# EAGLE board connector driver motor (EAGLE 9.6.2)
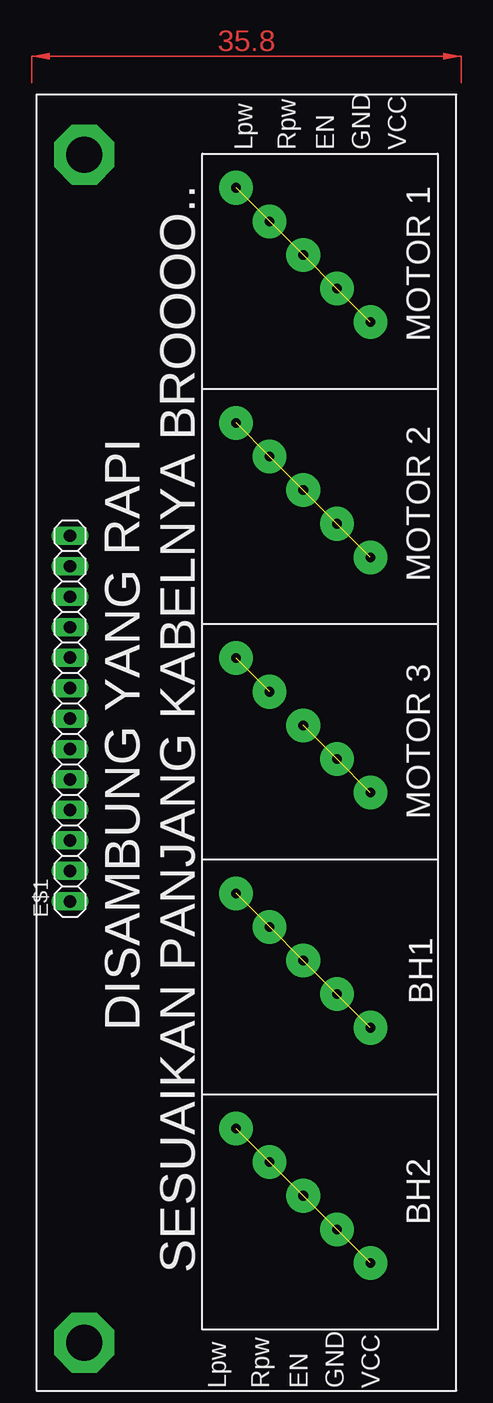
[diagram p0: board, top side]
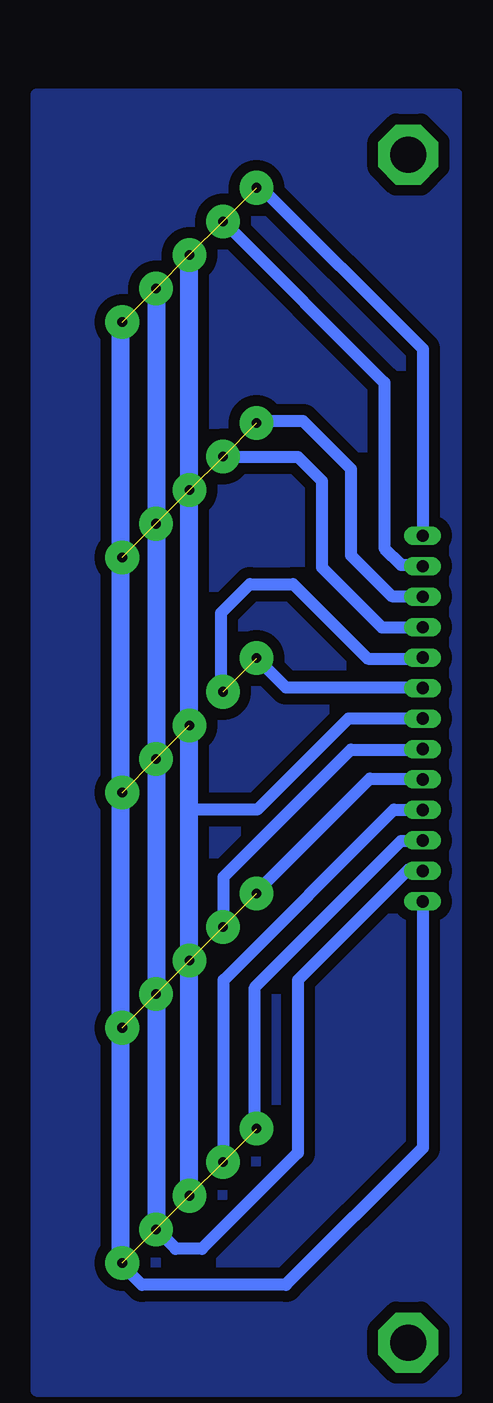
[diagram p1: board, bottom side, seen from below]

No outline drawn. Coordinates in mm, seen from the top.
Copper layers (1*16): Top 0.035mm / dielectric 1.5mm / Bottom 0.035mm
Design rules "default *": minimum track width 6mil, minimum drill 0.35mm, track to track 36mil, track to pad 36mil, pad to pad 36mil, via to via 36mil, smd to smd 6mil, copper to edge 40mil, drill to drill 6mil, minimum pad ring 10mil, minimum via ring 8mil, stop-mask expansion 4mil, vias tented up to drill 0mil, thermal gap 10mil

## Footprints (pad centres in the part's own frame; a part is rotated, then mirrored left to right if it is on the bottom)
1X13 = drill 1.016 long: 1 -15.24,0; 2 -12.7,0; 3 -10.16,0; 4 -7.62,0; 5 -5.08,0; 6 -2.54,0; 7 0,0; 8 2.54,0; 9 5.08,0; 10 7.62,0; 11 10.16,0; 12 12.7,0; 13 15.24,0

## Placement (x,y rotation side)
E$1  [1X13]  2.81,56 90 top

## Library data of the parts
E$1 = adafruit

## Tracks (layer width: path | path; a pad name or v marks a point on that pad's centre or on a via)
PLG
  pour Bottom: 0,108 35,108 35,0 0,0
S$1  (via drill 3 pad 5)
  other vias: 4,103
S$2  (via drill 3 pad 5)
  other vias: 4,4
S$3
  Bottom 1.5: 28,89 28,10.5
S$4  (via drill 0.8 pad 2.8)  (4 unrouted)
  other vias: 16.64,100.23 19.44,97.43 22.24,94.63 25.04,91.83 27.84,89.03
S$5  (via drill 0.8 pad 2.8)  (4 unrouted)
  other vias: 16.64,80.63 19.44,77.83 22.24,75.03 25.04,72.23 27.84,69.43
S$6  (via drill 0.8 pad 2.8)  (2 unrouted)
  other vias: 22.24,55.43 25.04,52.63 27.84,49.83
S$7  (via drill 0.8 pad 2.8)  (4 unrouted)
  other vias: 16.64,41.43 19.44,38.63 22.24,35.83 25.04,33.03 27.84,30.23
S$8  (via drill 0.8 pad 2.8)  (4 unrouted)
  other vias: 16.64,21.83 19.44,19.03 22.24,16.23 25.04,13.43 27.84,10.63
S$9
  Bottom 1.5: 25,92 25,13.5
S$10
  Bottom 1.5: 22.29,94.67 22.29,16.31 22.25,16.27
S$11
  Bottom 1: 16.5,100.5 2.8,86.8 2.8,71.2
S$12
  Bottom 1: 19.4,97.4 6,84 6,70.2 4.6,68.8 2.8,68.8
S$13
  Bottom 1: 16.6,80.8 12.8,80.8 8.8,76.8 8.8,69.6 5.4,66.2 2.8,66.2
S$14
  Bottom 1: 19.4,77.8 13.2,77.8 11.2,75.8 11.2,68.6 6.2,63.6 2.8,63.6
S$15
  Bottom 1: 2.8,56 9,56 16.6,48.4 22,48.4
S$16  (via drill 0.8 pad 2.8)  (1 unrouted)
  other vias: 16.64,61.03 19.44,58.23
S$17
  Bottom 1: 16.6,61 14.2,58.6 2.8,58.6
S$18
  Bottom 1: 19.4,38.6 19.4,42.8 8.8,53.4 2.8,53.4
S$19
  Bottom 1: 16.8,41.4 7.2,51 2.8,51
S$20
  Bottom 1: 19.4,19 19.4,34.2 5.2,48.4 2.8,48.4
S$21
  Bottom 1: 16.8,22 16.8,33.6 4.6,45.8 2.8,45.8
S$22
  Bottom 1: 2.8,43.4 4,43.4 13.2,34.2 13.2,19.8 21.2,11.8 23.4,11.8 25,13.4
S$23
  Bottom 1: 2.8,40.8 2.8,20.2 14.2,8.8 26.2,8.8 27.8,10.4
S$24
  Bottom 1: 19.4,58.4 19.6,58.6 19.6,64.8 17.2,67.2 13.6,67.2 7.4,61 2.8,61
(copper drawn outside any net)
  shapes: Top area x1

## Text on the board
tPlace: Lpw | Rpw | EN | GND | VCC | MOTOR 1 | MOTOR 2 | MOTOR 3 | BH1 | DISAMBUNG YANG RAPI | BH2 | SESUAIKAN PANJANG KABELNYA BROOOO.. | Lpw | Rpw | EN | GND | VCC